# EAGLE board PCB (EAGLE 6.5.0)
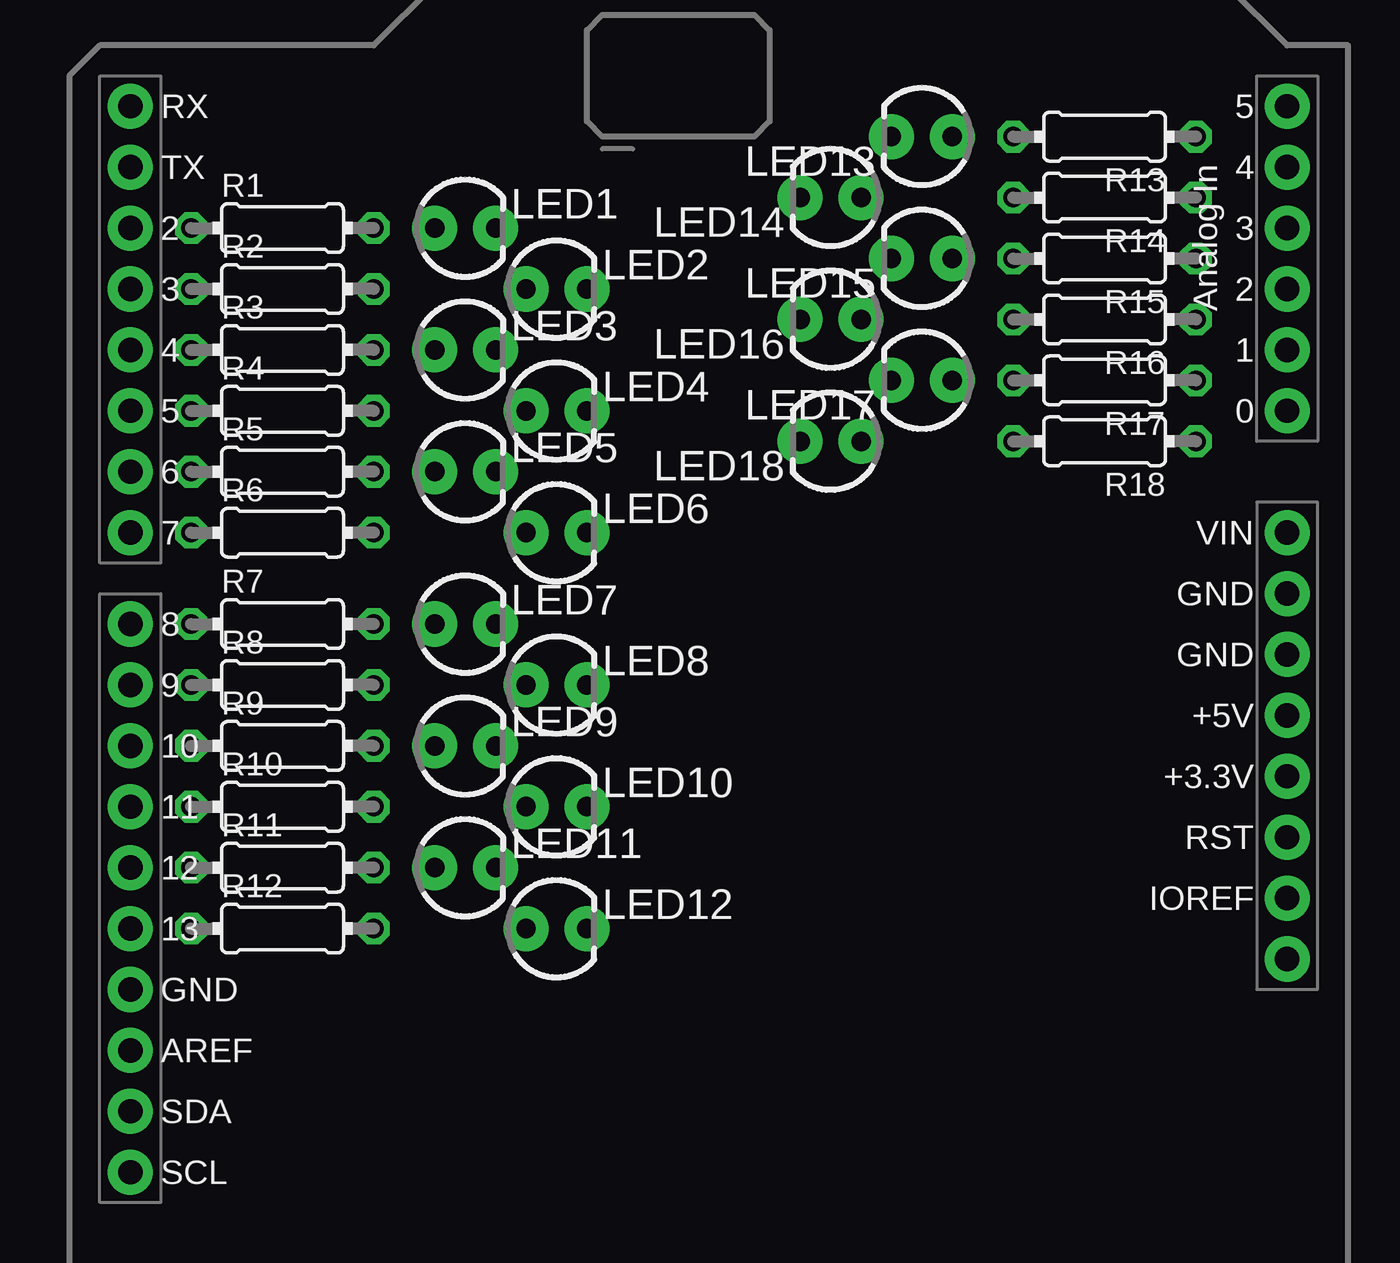
[diagram p0: board, top side]
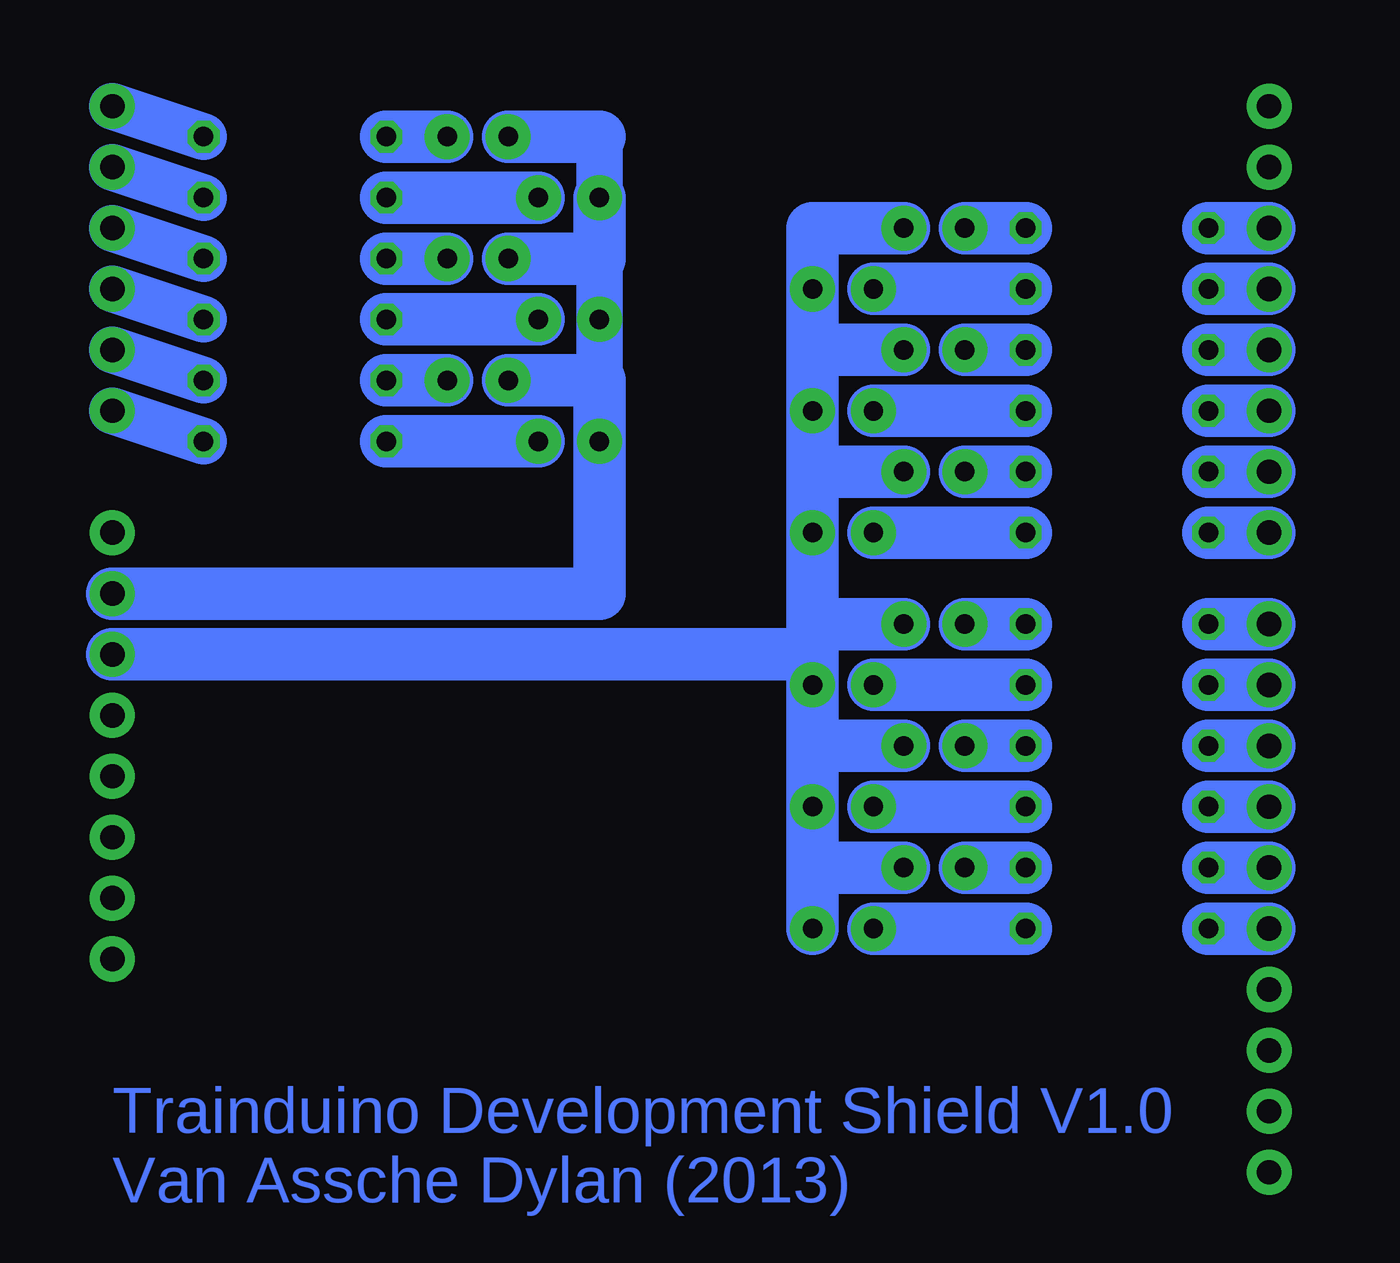
[diagram p1: board, bottom side, seen from below]

No outline drawn. Coordinates in mm, seen from the top.
Copper layers (1*16): Top 0.035mm / dielectric 1.5mm / Bottom 0.035mm
Design rules "default": minimum track width 10mil, minimum drill 24mil, track to track 8mil, track to pad 8mil, pad to pad 8mil, via to via 8mil, smd to smd 8mil, copper to edge 40mil, drill to drill 8mil, minimum pad ring 10mil, minimum via ring 8mil, stop-mask expansion 4mil, vias tented up to drill 0mil, thermal gap 10mil

## Footprints (pad centres in the part's own frame; a part is rotated, then mirrored left to right if it is on the bottom)
LED3MM = drill 0.813 pad 1.88: A -1.27,0; K 1.27,0
0204/7 = drill 0.813 octagon: 1 -3.81,0; 2 3.81,0
UNO_R3_SHIELD = drill 1.016 pad 1.88: 3.3V 50.8,26.67; 5V 50.8,29.21; A0 50.8,41.91; A1 50.8,44.45; A2 50.8,46.99; A3 50.8,49.53; A4 50.8,52.07; A5 50.8,54.61; AREF 2.54,15.24; D2 2.54,49.53; D3 2.54,46.99; D4 2.54,44.45; D5 2.54,41.91; D6 2.54,39.37; D7 2.54,36.83; D8 2.54,33.02; D9 2.54,30.48; D10 2.54,27.94; D11 2.54,25.4; D12 2.54,22.86; D13 2.54,20.32; GND@0 50.8,31.75; GND@1 50.8,34.29; GND@2 2.54,17.78; IOREF 50.8,21.59; NC 50.8,19.05; RES 50.8,24.13; RX 2.54,54.61; SCL 2.54,10.16; SDA 2.54,12.7; TX 2.54,52.07; VIN 50.8,36.83

## Placement (x,y rotation side)
LED1  [LED3MM]  16.51,49.53 0 top
LED2  [LED3MM]  20.32,46.99 0 top
LED3  [LED3MM]  16.51,44.45 0 top
LED4  [LED3MM]  20.32,41.91 0 top
LED5  [LED3MM]  16.51,39.37 0 top
LED6  [LED3MM]  20.32,36.83 0 top
LED7  [LED3MM]  16.51,33.02 0 top
LED8  [LED3MM]  20.32,30.48 0 top
LED9  [LED3MM]  16.51,27.94 0 top
LED10  [LED3MM]  20.32,25.4 0 top
LED11  [LED3MM]  16.51,22.86 0 top
LED12  [LED3MM]  20.32,20.32 0 top
LED13  [LED3MM]  35.56,53.34 180 top
LED14  [LED3MM]  31.75,50.8 180 top
LED15  [LED3MM]  35.56,48.26 180 top
LED16  [LED3MM]  31.75,45.72 180 top
LED17  [LED3MM]  35.56,43.18 180 top
LED18  [LED3MM]  31.75,40.64 180 top
R1  220 Ω  [0204/7]  8.89,49.53 0 top
R2  220 Ω  [0204/7]  8.89,46.99 0 top
R3  220 Ω  [0204/7]  8.89,44.45 0 top
R4  [0204/7]  8.89,41.91 0 top
R5  220 Ω  [0204/7]  8.89,39.37 0 top
R6  220 Ω  [0204/7]  8.89,36.83 0 top
R7  [0204/7]  8.89,33.02 0 top
R8  220 Ω  [0204/7]  8.89,30.48 0 top
R9  220 Ω  [0204/7]  8.89,27.94 0 top
R10  220 Ω  [0204/7]  8.89,25.4 0 top
R11  220 Ω  [0204/7]  8.89,22.86 0 top
R12  220 Ω  [0204/7]  8.89,20.32 0 top
R13  220 Ω  [0204/7]  43.18,53.34 180 top
R14  220 Ω  [0204/7]  43.18,50.8 180 top
R15  220 Ω  [0204/7]  43.18,48.26 180 top
R16  220 Ω  [0204/7]  43.18,45.72 180 top
R17  220 Ω  [0204/7]  43.18,43.18 180 top
R18  220 Ω  [0204/7]  43.18,40.64 180 top
U$1  ARDUINO_R3_SHIELD  [UNO_R3_SHIELD]  0,0 0 top

## Library data of the parts
LED1-LED18 = SparkFun-LED
R1-R18 = resistor
U$1 = SparkFun-Boards

## Nets
N$1: R12.1 U$1.D13
N$2: R11.1 U$1.D12
N$3: R10.1 U$1.D11
N$4: R9.1 U$1.D10
N$5: R8.1 U$1.D9
N$6: R7.1 U$1.D8
N$7: R6.1 U$1.D7
N$8: R5.1 U$1.D6
N$9: R4.1 U$1.D5
N$10: R3.1 U$1.D4
N$11: R2.1 U$1.D3
N$12: R1.1 U$1.D2
N$13: LED1.A R1.2
N$14: LED2.A R2.2
N$15: LED3.A R3.2
N$16: LED4.A R4.2
N$17: LED5.A R5.2
N$18: LED6.A R6.2
N$19: LED7.A R7.2
N$20: LED8.A R8.2
N$21: LED9.A R9.2
N$22: LED10.A R10.2
N$23: LED11.A R11.2
N$24: LED12.A R12.2
N$25: LED1.K LED2.K LED3.K LED4.K LED5.K LED6.K LED7.K LED8.K LED9.K LED10.K LED11.K LED12.K U$1.GND@0
N$26: LED13.A R13.2
N$27: LED14.A R14.2
N$28: LED15.A R15.2
N$29: LED16.A R16.2
N$30: LED17.A R17.2
N$31: LED13.K LED14.K LED15.K LED16.K LED17.K LED18.K U$1.GND@1
N$32: R13.1 U$1.A5
N$33: R15.1 U$1.A3
N$34: R16.1 U$1.A2
N$35: R17.1 U$1.A1
N$36: R14.1 U$1.A4
N$37: LED18.A R18.2
N$38: R18.1 U$1.A0

## Tracks (layer width: path | path; a pad name or v marks a point on that pad's centre or on a via)
N$1
  Bottom 2.184: R12.1 U$1.D13
N$2
  Bottom 2.184: R11.1 U$1.D12
N$3
  Bottom 2.184: U$1.D11 R10.1
N$4
  Bottom 2.184: R9.1 U$1.D10
N$5
  Bottom 2.184: U$1.D9 R8.1
N$6
  Bottom 2.184: U$1.D8 R7.1
N$7
  Bottom 2.184: U$1.D7 R6.1
N$8
  Bottom 2.184: U$1.D6 R5.1
N$9
  Bottom 2.184: U$1.D5 R4.1
N$10
  Bottom 2.184: U$1.D4 R3.1
N$11
  Bottom 2.184: U$1.D3 R2.1
N$12
  Bottom 2.184: U$1.D2 R1.1
N$13
  Bottom 2.184: R1.2 LED1.A
N$14
  Bottom 2.184: R2.2 LED2.A
N$15
  Bottom 2.184: R3.2 LED3.A
N$16
  Bottom 2.184: R4.2 LED4.A
N$17
  Bottom 2.184: R5.2 LED5.A
N$18
  Bottom 2.184: R6.2 LED6.A
N$19
  Bottom 2.184: R7.2 LED7.A
N$20
  Bottom 2.184: R8.2 LED8.A
N$21
  Bottom 2.184: R9.2 LED9.A
N$22
  Bottom 2.184: R10.2 LED10.A
N$23
  Bottom 2.184: R11.2 LED11.A
N$24
  Bottom 2.184: R12.2 LED12.A
N$25
  Bottom 1.93: 21.59,31.75 21.59,33.02
  Bottom 2.184: LED12.K 21.59,22.86 | 21.59,22.86 LED10.K 21.59,27.94 | 21.59,27.94 LED8.K 21.59,31.75 U$1.GND@0 | 21.59,39.37 LED6.K 21.59,33.02 LED7.K | 21.59,39.37 LED4.K 21.59,44.45 | 21.59,44.45 LED2.K 21.59,49.53 LED1.K | LED3.K 21.59,44.45 | LED5.K 21.59,39.37 | LED9.K 21.59,27.94 | LED11.K 21.59,22.86
N$26
  Bottom 2.184: LED13.A R13.2
N$27
  Bottom 2.184: R14.2 LED14.A
N$28
  Bottom 2.184: R15.2 LED15.A
N$29
  Bottom 2.184: R16.2 LED16.A
N$30
  Bottom 2.184: R17.2 LED17.A
N$31
  Bottom 1.93: 30.48,43.18 LED16.K 30.48,48.26 | LED14.K 30.48,53.34
  Bottom 2.184: LED17.K 30.48,43.18 LED18.K 30.48,34.29 U$1.GND@1 | LED14.K 30.48,48.26 LED15.K | 30.48,53.34 LED13.K
N$32
  Bottom 1.93: R13.1 U$1.A5
N$33
  Bottom 1.93: R15.1 U$1.A3
N$34
  Bottom 1.93: U$1.A2 R16.1
N$35
  Bottom 1.93: U$1.A1 R17.1
N$36
  Bottom 1.93: R14.1 U$1.A4
N$37
  Bottom 2.184: R18.2 LED18.A
N$38
  Bottom 1.93: U$1.A0 R18.1

## Text on the board
Bottom: Trainduino Development Shield V1.0 / Van Assche Dylan (2013)